# EAGLE board WCS1500_PCB (EAGLE 7.5.0)
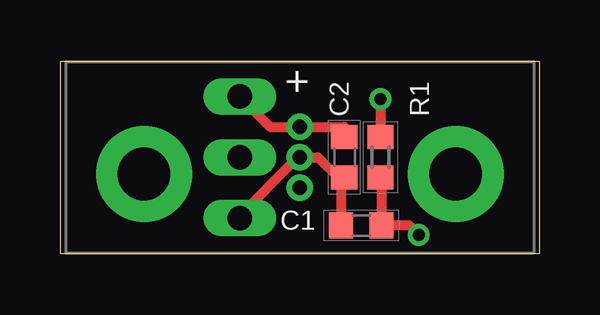
[diagram p0: board, top side]
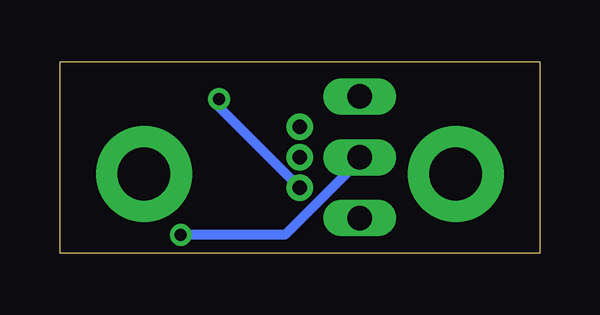
[diagram p1: board, bottom side, seen from below]

Size 20 x 8 mm. Coordinates in mm from the lower left corner, seen from the top.
Outline: 0,0 20,0 20,8 0,8 0,0
Copper layers (1*16): Top 0.035mm / dielectric 1.5mm / Bottom 0.035mm
Design rules "default": minimum track width 10mil, minimum drill 24mil, track to track 8mil, track to pad 8mil, pad to pad 8mil, via to via 8mil, smd to smd 8mil, copper to edge 40mil, drill to drill 8mil, minimum pad ring 10mil, minimum via ring 8mil, stop-mask expansion 4mil, vias tented up to drill 0mil, thermal gap 10mil

## Footprints (pad centres in the part's own frame; a part is rotated, then mirrored left to right if it is on the bottom)
C0603 = smd 1 x 1.1: 1 -0.85,0; 2 0.85,0
1X03 = drill 1.016 long: 1 -2.54,0; 2 0,0; 3 2.54,0
R0603 = smd 1 x 1.1: 1 -0.85,0; 2 0.85,0
WCS1500 = drill 0.6: GND 0,0; OUT 0,-1.27; VDD 0,1.27 | drill 2.2 pad 4: H1 -6.5,-0.7; H2 6.5,-0.7

## Placement (x,y rotation side)
C1  100nF  [C0603]  12.57,1.16 180 top
C2  100nF  [C0603]  11.86,4 270 top
JP1  [1X03]  7.5,4 90 top
R1  1k  [R0603]  13.37,4 90 top
U$1  WCS1500  [WCS1500]  10,4 0 top

## Library data of the parts
C1 C2 R1 = resistor
JP1 = pinhead
U$1 = _marek

## Nets
+5V: C2.1 JP1.3 U$1.VDD
GND: C1.2 C2.2 JP1.1 U$1.GND
N$1: R1.2 U$1.OUT
N$2: C1.1 JP1.2 R1.1

## Tracks (layer width: path | path; a pad name or v marks a point on that pad's centre or on a via)
+5V
  Top 0.406: C2.1 11.86,5.27 U$1.VDD 8.77,5.27 JP1.3
GND
  Top 0.406: C1.2 11.71,3 C2.2 11.61,3.15 10.76,4 U$1.GND 9.79,3.79 9.7,3.79 7.5,1.58 JP1.1
N$1  (via drill 0.5)
  Top 0.406: v13.36,6.43 v13.37,6.42 R1.2
  Bottom 0.406: U$1.OUT 13.36,6.09 v13.36,6.43
N$2  (via drill 0.5)
  Top 0.406: R1.1 13.41,3.1 C1.1 14.56,1.16 v14.96,0.76
  Bottom 0.406: JP1.2 7.9,3.6 7.9,3.48 10.62,0.76 v14.96,0.76